# EAGLE board CT_schematic (EAGLE 7.6.0)

Size 100 x 80 mm. Coordinates in mm from the lower left corner, seen from the top.
Outline: 0,0 100,0 100,80 0,80 0,0
Copper layers (1*16): Top 0.035mm / dielectric 1.5mm / Bottom 0.035mm
Design rules "default": minimum track width 10mil, minimum drill 24mil, track to track 8mil, track to pad 8mil, pad to pad 8mil, via to via 8mil, smd to smd 8mil, copper to edge 40mil, drill to drill 8mil, minimum pad ring 10mil, minimum via ring 8mil, stop-mask expansion 4mil, vias tented up to drill 0mil, thermal gap 10mil

## Footprints (pad centres in the part's own frame; a part is rotated, then mirrored left to right if it is on the bottom)
C0603 = smd 0.8 x 0.8: 1 -0.762,0; 2 0.762,0
C0402 = smd 0.5 x 0.5: 1 -0.508,0; 2 0.508,0
EXV-9B = smd 2.718 x 1.778: 1 -2.108,0; 2 2.108,0
C1206 = smd 1.3 x 1.6: 1 -1.524,0; 2 1.524,0
C1210 = smd 1.2 x 2.5: 1 -1.524,0; 2 1.524,0
EXV-9H = smd 3.505 x 1.676: 1 -2.857,0; 2 2.857,0
L0603 = smd 0.8 x 0.8: 1 -0.762,0; 2 0.762,0
PJ-037B_PACKAGE = drill 3.7 square: 1 12,0 | drill 3.2 square: 2 6,0
R0603 = smd 0.8 x 0.8: 1 -0.762,0; 2 0.762,0
LQFP64 = smd 0.3 x 1.2: 1 -3.75,-5.75; 2 -3.25,-5.75; 3 -2.75,-5.75; 4 -2.25,-5.75; 5 -1.75,-5.75; 6 -1.25,-5.75; 7 -0.75,-5.75; 8 -0.25,-5.75; 9 0.25,-5.75; 10 0.75,-5.75; 11 1.25,-5.75; 12 1.75,-5.75; 13 2.25,-5.75; 14 2.75,-5.75; 15 3.25,-5.75; 16 3.75,-5.75; 33 3.75,5.75; 34 3.25,5.75; 35 2.75,5.75; 36 2.25,5.75; 37 1.75,5.75; 38 1.25,5.75; 39 0.75,5.75; 40 0.25,5.75; 41 -0.25,5.75; 42 -0.75,5.75; 43 -1.25,5.75; 44 -1.75,5.75; 45 -2.25,5.75; 46 -2.75,5.75; 47 -3.25,5.75; 48 -3.75,5.75 | smd 1.2 x 0.3: 17 5.75,-3.75; 18 5.75,-3.25; 19 5.75,-2.75; 20 5.75,-2.25; 21 5.75,-1.75; 22 5.75,-1.25; 23 5.75,-0.75; 24 5.75,-0.25; 25 5.75,0.25; 26 5.75,0.75; 27 5.75,1.25; 28 5.75,1.75; 29 5.75,2.25; 30 5.75,2.75; 31 5.75,3.25; 32 5.75,3.75; 49 -5.75,3.75; 50 -5.75,3.25; 51 -5.75,2.75; 52 -5.75,2.25; 53 -5.75,1.75; 54 -5.75,1.25; 55 -5.75,0.75; 56 -5.75,0.25; 57 -5.75,-0.25; 58 -5.75,-0.75; 59 -5.75,-1.25; 60 -5.75,-1.75; 61 -5.75,-2.25; 62 -5.75,-2.75; 63 -5.75,-3.25; 64 -5.75,-3.75
SOT-23-6 = smd 1.1 x 0.6: 1 -1.4,0.95; 2 -1.4,0; 3 -1.4,-0.95; 4 1.4,-0.95; 5 1.4,0; 6 1.4,0.95
WSON-6 = smd 0.4 x 0.6: 1 -1,-1.4; 2 0,-1.4; 3 1,-1.4; 4 1,1.4; 5 0,1.4; 6 -1,1.4 | drill 0.2 pad 0.3: P$1 0.95,0; P$2 -0.95,0; P$3 0,-0.5; P$4 0,0.5 | smd 2.4 x 1.5: PAD 0,0
TDFN-8/6MM = smd 0.3 x 0.75: 1 0,0; 2 0.5,0; 3 1,0; 4 1.5,0; 5 1.5,3; 6 1,3; 7 0.5,3; 8 0,3
MICRO_USB_AB = smd 0.4 x 1.35: 1 1.3,0.26; 2 0.65,0.26; 3 0,0.26; 4 -0.65,0.26; 5 -1.3,0.26 | drill 0.6 pad 0.95 long: 6 4.175,-2.54; 7 -4.175,-2.54 | drill 0.7 pad 1.1 long: 8 -2.225,0.46; 9 2.225,0.46
SOT143B = smd 1 x 0.7: 1 -0.75,-1 | smd 0.6 x 0.7: 2 0.95,-1; 3 0.95,1; 4 -0.95,1
ASEK = smd 1.4 x 1: 1 -1.1,-0.8; 2 1.1,-0.8; 3 1.1,0.8; 4 -1.1,0.8
ASFL1 = smd 1.7 x 1.5: 1 -1.27,-1.1; 2 1.27,-1.1; 3 1.27,1.1; 4 -1.27,1.1
LP2954 = smd 1.6 x 0.6: 1 -2.475,1.905 | smd 1.55 x 0.6: 2 -2.475,0.635; 3 -2.475,-0.635; 4 -2.475,-1.905; 5 2.475,-1.905; 6 2.475,-0.635; 7 2.475,0.635; 8 2.475,1.905
WSON-8 = smd 0.3 x 0.6: 1 -0.75,0; 2 0.05,0; 3 0.85,0; 4 1.65,0; 5 1.65,3.8; 6 0.85,3.8; 7 0.05,3.8; 8 -0.75,3.8 | smd 3 x 2.6: PAD 0.45,1.9
SON-6 = smd 0.55 x 0.3: 1 -0.355,0.5 | smd 0.52 x 0.3: 2 -0.37,0; 3 -0.37,-0.5; 4 0.37,-0.5; 5 0.37,0; 6 0.37,0.5
SW_4-1437565-2 = smd 1.4 x 2.1: 1 -2.23,4.55; 2 -2.23,-4.55; 3 2.23,4.55; 4 2.23,-4.55
LGM67K-G1J2-24-Z = smd 0.8 x 1.4: A -2,0; C 0,0
NC7SZ125M5X = smd 1.3 x 0.7: 1 -1.3,0.95; 2 -1.3,0; 3 -1.3,-0.95; 4 1.3,-0.95; 5 1.3,0.95

## Placement (x,y rotation side)
C1  1e-06  [C0603]  -46.99,59.69 0 top  (outside the outline)
C2  1e-07  [C0603]  -50.8,59.69 0 top  (outside the outline)
C3  1e-07  [C0603]  -54.61,59.69 0 top  (outside the outline)
C4  1e-07  [C0603]  -58.42,59.69 0 top  (outside the outline)
C5  1e-07  [C0603]  -62.23,59.69 0 top  (outside the outline)
C6  1e-07  [C0603]  -66.04,59.69 0 top  (outside the outline)
C7  4.7e-06  [C0603]  -39.37,59.69 0 top  (outside the outline)
C8  2.2e-06  [C0603]  -43.18,59.69 0 top  (outside the outline)
C9  1e-08  [C0603]  -15.24,64.77 0 top  (outside the outline)
C10  1e-06  [C0603]  -19.05,64.77 0 top  (outside the outline)
C11  1e-08  [C0402]  -68.58,64.77 0 top  (outside the outline)
C12  1e-08  [C0402]  -15.24,69.85 0 top  (outside the outline)
C13  1e-08  [C0402]  -19.05,69.85 0 top  (outside the outline)
C14  1e-08  [C0402]  -22.86,69.85 0 top  (outside the outline)
C15  1e-08  [C0402]  -26.67,69.85 0 top  (outside the outline)
C16  1e-06  [EXV-9B]  -43.18,46.99 0 top  (outside the outline)
C17  2.2e-06  [EXV-9B]  -52.07,46.99 0 top  (outside the outline)
C18  1e-08  [C0402]  -30.48,69.85 0 top  (outside the outline)
C19  1e-05  [C1206]  -35.56,46.99 0 top  (outside the outline)
C20  1e-05  [C1210]  -29.21,48.26 0 top  (outside the outline)
C21  1e-07  [C0402]  -34.29,69.85 0 top  (outside the outline)
C22  0.0001  [EXV-9H]  -45.72,40.64 0 top  (outside the outline)
C23  0.0001  [EXV-9H]  -57.15,40.64 0 top  (outside the outline)
C24  1e-08  [C0402]  -38.1,69.85 0 top  (outside the outline)
F1  240.0  [L0603]  -22.86,64.77 0 top  (outside the outline)
J1  PJ-037B  [PJ-037B_PACKAGE]  -27.94,7.62 0 top  (outside the outline)
R2  1000.0  [R0603]  -26.67,64.77 0 top  (outside the outline)
R4  4700.0  [R0603]  -30.48,64.77 0 top  (outside the outline)
R5  2200.0  [R0603]  -34.29,64.77 0 top  (outside the outline)
R6  2200.0  [R0603]  -38.1,64.77 0 top  (outside the outline)
R7  2200.0  [R0603]  -41.91,64.77 0 top  (outside the outline)
R8  2200.0  [R0603]  -45.72,64.77 0 top  (outside the outline)
R9  2200.0  [R0603]  -49.53,64.77 0 top  (outside the outline)
R10  2200.0  [R0603]  -53.34,64.77 0 top  (outside the outline)
R11  47000.0  [R0603]  -52.07,54.61 0 top  (outside the outline)
R12  10000.0  [R0603]  -57.15,54.61 0 top  (outside the outline)
R13  10000.0  [R0603]  -62.23,54.61 0 top  (outside the outline)
R14  10000.0  [R0603]  -67.31,54.61 0 top  (outside the outline)
R15  10000.0  [R0603]  -15.24,59.69 0 top  (outside the outline)
R16  10000.0  [R0603]  -20.32,59.69 0 top  (outside the outline)
R17  10000.0  [R0603]  -25.4,59.69 0 top  (outside the outline)
R18  100000.0  [R0603]  -21.59,54.61 0 top  (outside the outline)
R19  100000.0  [R0603]  -26.67,54.61 0 top  (outside the outline)
R20  164658.62  [R0603]  -16.51,54.61 0 top  (outside the outline)
R21  100000.0  [R0603]  -31.75,54.61 0 top  (outside the outline)
R22  100000.0  [R0603]  -36.83,54.61 0 top  (outside the outline)
R23  3900.0  [R0603]  -57.15,64.77 0 top  (outside the outline)
R24  1000.0  [R0603]  -60.96,64.77 0 top  (outside the outline)
R25  10000.0  [R0603]  -30.48,59.69 0 top  (outside the outline)
R26  10000.0  [R0603]  -35.56,59.69 0 top  (outside the outline)
R27  9100.0  [R0603]  -64.77,64.77 0 top  (outside the outline)
R28  680000.0  [R0603]  -41.91,54.61 0 top  (outside the outline)
R29  120000.0  [R0603]  -46.99,54.61 0 top  (outside the outline)
U1  STM32F401RBT6  [LQFP64]  -40.64,7.62 0 top  (outside the outline)
U2  MAX4995AAUT+T  [SOT-23-6]  -59.69,46.99 0 top  (outside the outline)
U3  HDC1080DMBR  [WSON-6]  -16.51,40.64 0 top  (outside the outline)
U4  24AA00T-I/MNY  [TDFN-8/6MM]  -58.42,19.05 0 top  (outside the outline)
U5  24AA128T-I/MNY  [TDFN-8/6MM]  -44.45,19.05 0 top  (outside the outline)
U6  47590-0001  [MICRO_USB_AB]  -54.61,7.62 0 top  (outside the outline)
U7  prtr5v0u2ax  [SOT143B]  -50.8,69.85 0 top  (outside the outline)
U8  ASEK-32.768KHz-ECST  [ASEK]  -36.83,40.64 0 top  (outside the outline)
U9  ASFL1-25MHZ-NCS  [ASFL1]  -63.5,30.48 0 top  (outside the outline)
U10  LP2954AIMX/NOPB  [LP2954]  -25.4,31.75 0 top  (outside the outline)
U11  LP3878SDX-ADJ/NOPB  [WSON-8]  -46.99,29.21 0 top  (outside the outline)
U12  TPS3895ADRYR  [SON-6]  -54.61,68.58 0 top  (outside the outline)
U13  4-1437565-2  [SW_4-1437565-2]  -27.94,20.32 0 top  (outside the outline)
U14  Q65110A2395  [LGM67K-G1J2-24-Z]  -17.78,48.26 0 top  (outside the outline)
U15  nc7sz125m5x  [NC7SZ125M5X]  -64.77,46.99 0 top  (outside the outline)

## Library data of the parts
C1-C24 F1 J1 R2 R4-R29 U1-U15 = circuit_tree

## Nets
CLK_U1_3: U1.3 U8.3
CLK_U1_5: U1.5 U9.3
GND: C1.2 C2.2 C3.2 C4.2 C5.2 C6.2 C7.2 C8.2 C9.2 C10.2 C11.2 C12.2 C13.2 C14.2 C15.2 C16.2 C17.2 C18.2 C19.2 C20.2 C21.2 C22.2 C23.2 C24.2 J1.2 R2.2 R11.2 R12.2 R14.2 R21.2 R24.2 R27.2 R29.2 U1.12 U1.18 U1.31 U1.47 U1.63 U2.2 U3.2 U3.PAD U4.4 U5.4 U5.7 U6.5 U6.6 U6.7 U6.8 U6.9 U7.1 U8.2 U9.2 U10.4 U11.3 U11.PAD U12.2 U14.C U15.1 U15.3
NET_U1_7: R4.1 U1.7 U15.4
NET_U1_13: C9.1 C10.1 F1.1 U1.13
NET_U1_29: R7.1 U1.29 U4.6
NET_U1_30: C8.1 U1.30
NET_U1_40: R10.1 U1.40 U5.5
NET_U1_41: R9.1 U1.41 U5.6
NET_U1_55: R8.1 U1.55 U4.5
NET_U1_58: R5.1 U1.58 U3.6
NET_U1_59: R6.1 U1.59 U3.1
NET_U1_60: R12.1 U1.60
NET_U1_61: U14.A
NET_U1_62: U13.3 U13.4
NET_U2_3: R11.1 U2.3
NET_U5_1: R15.1 U5.1
NET_U5_2: R16.1 U5.2
NET_U5_3: R17.1 U5.3
NET_U10_3: R19.1 U10.3
NET_U10_5: R18.1 U10.5
NET_U10_7: R20.2 R21.1 U10.7
NET_U11_1: C18.1 U11.1
NET_U11_6: R23.2 R24.1 U11.6
NET_U11_8: R22.1 U11.8
NET_U12_1: R26.1 R27.1 U12.1
NET_U12_3: R28.2 R29.1 U12.3
NET_U12_4: R25.1 U12.4 U15.2
NET_U13_1: R2.1 U13.1 U13.2
PROC_GPIO_TO_U1_USB_FAULT: R13.1 U1.4 U2.6
PROC_GPIO_TO_U1_VBUS_EN: R14.1 U1.2 U2.4
PROC_USB_OTG_FS_DM: U1.44 U6.2 U7.3
PROC_USB_OTG_FS_DP: U1.45 U6.3 U7.2
PROC_USB_OTG_FS_ID: U1.43 U6.4
PROC_USB_OTG_FS_VBUS: U1.42 U2.1 U6.1 U7.4
VCC_S1_8V4: C16.1 C19.1 C22.1 C23.1 J1.1 R19.2 R22.2 U10.8 U11.4
VCC_TIER1_3V3: C1.1 C2.1 C3.1 C4.1 C5.1 C6.1 C7.1 C11.1 C12.1 C13.1 C14.1 C15.1 C17.1 C21.1 C24.1 F1.2 R4.2 R5.2 R6.2 R7.2 R8.2 R9.2 R10.2 R13.2 R15.2 R16.2 R17.2 R18.2 R20.1 R25.2 R26.2 R28.1 U1.1 U1.19 U1.32 U1.48 U1.64 U3.5 U4.8 U5.8 U8.4 U9.4 U10.1 U12.6 U15.5
VCC_TIER1_5V0: C20.1 R23.1 U2.5 U11.5

## Tracks (layer width: path | path; a pad name or v marks a point on that pad's centre or on a via)
CLK_U1_3  (1 unrouted)
CLK_U1_5  (1 unrouted)
GND  (58 unrouted)
NET_U1_7  (2 unrouted)
NET_U1_13  (3 unrouted)
NET_U1_29  (2 unrouted)
NET_U1_30  (1 unrouted)
NET_U1_40  (2 unrouted)
NET_U1_41  (2 unrouted)
NET_U1_55  (2 unrouted)
NET_U1_58  (2 unrouted)
NET_U1_59  (2 unrouted)
NET_U1_60  (1 unrouted)
NET_U1_62  (1 unrouted)
NET_U2_3  (1 unrouted)
NET_U5_1  (1 unrouted)
NET_U5_2  (1 unrouted)
NET_U5_3  (1 unrouted)
NET_U10_3  (1 unrouted)
NET_U10_5  (1 unrouted)
NET_U10_7  (2 unrouted)
NET_U11_1  (1 unrouted)
NET_U11_6  (2 unrouted)
NET_U11_8  (1 unrouted)
NET_U12_1  (2 unrouted)
NET_U12_3  (2 unrouted)
NET_U12_4  (2 unrouted)
NET_U13_1  (2 unrouted)
PROC_GPIO_TO_U1_USB_FAULT  (2 unrouted)
PROC_GPIO_TO_U1_VBUS_EN  (2 unrouted)
PROC_USB_OTG_FS_DM  (2 unrouted)
PROC_USB_OTG_FS_DP  (2 unrouted)
PROC_USB_OTG_FS_ID  (1 unrouted)
PROC_USB_OTG_FS_VBUS  (3 unrouted)
VCC_S1_8V4  (8 unrouted)
VCC_TIER1_3V3  (44 unrouted)
VCC_TIER1_5V0  (3 unrouted)